# Altium PCB PCB4.PcbDoc
Units mm, origin at the board's own origin, x right, y up, seen from the top; angles counter-clockwise.
Board outline 46.5 x 66 mm, 2 copper layers (Top Layer, Bottom Layer); 30 components, 29 nets, 132 pads, 39 vias.
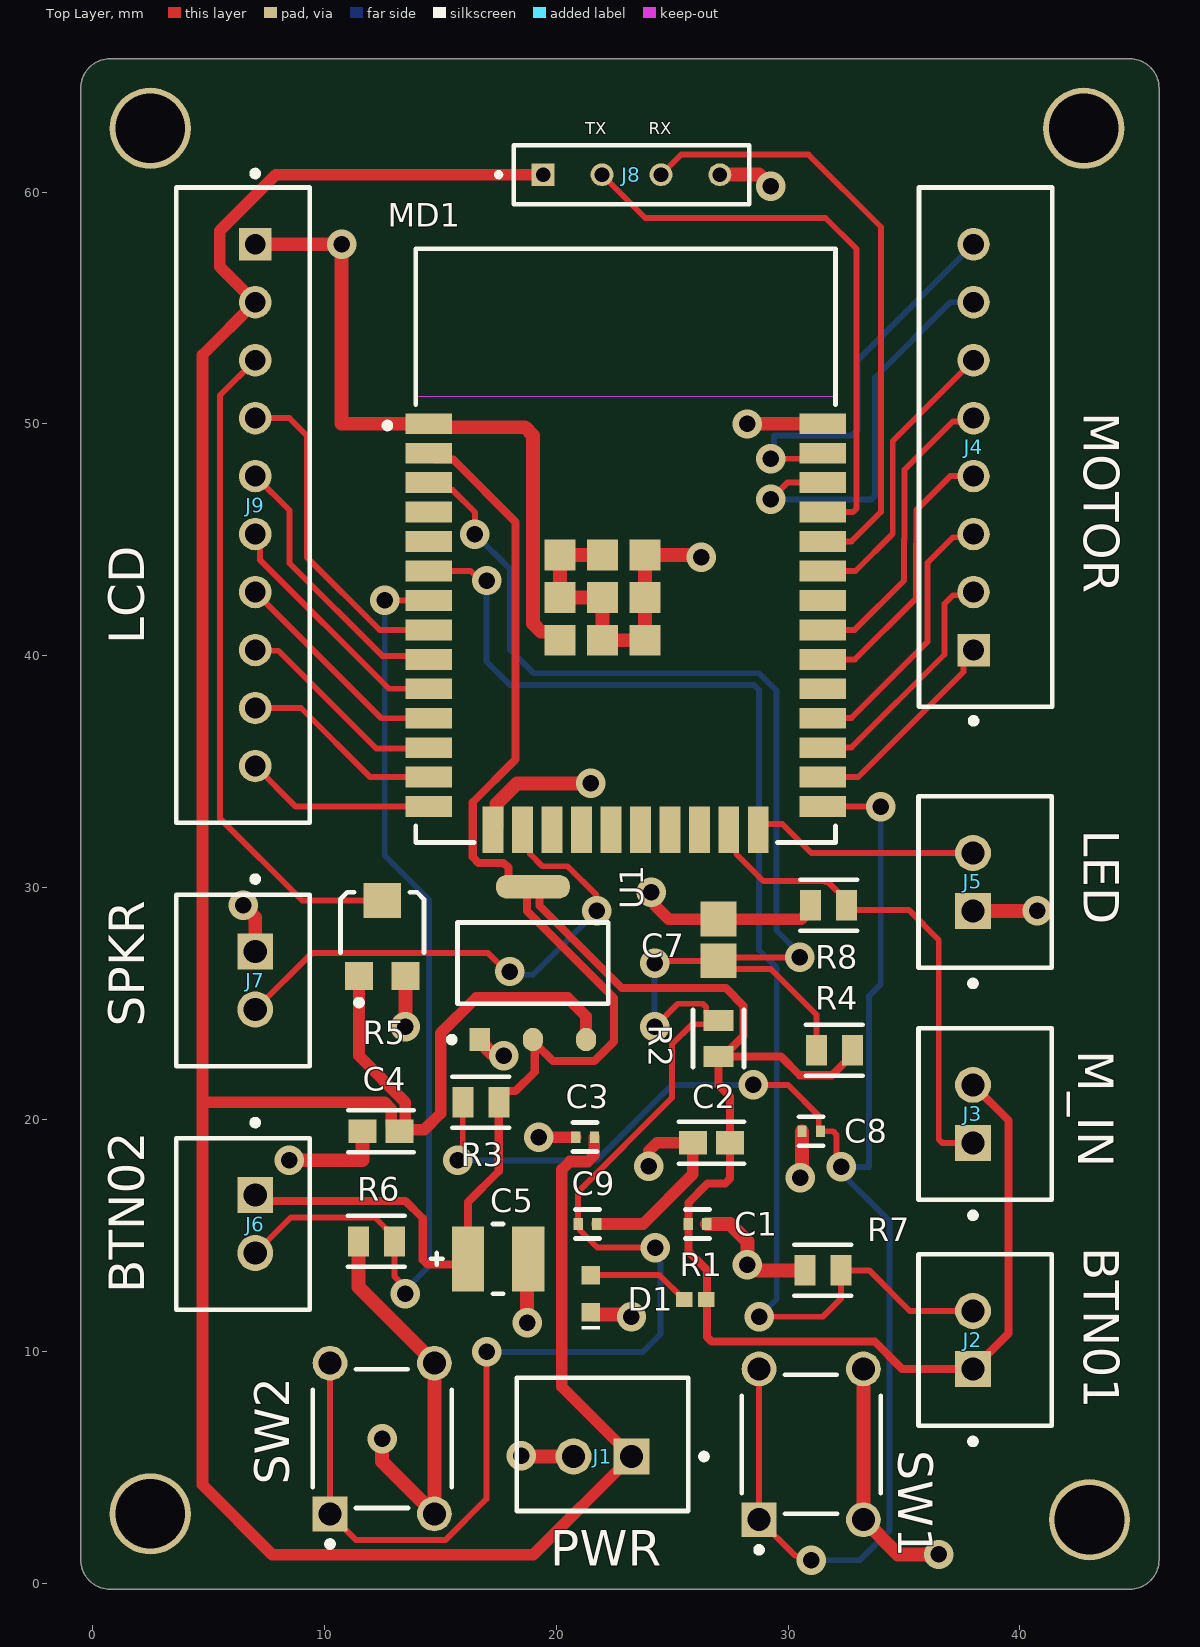
[diagram p0: Top Layer view]
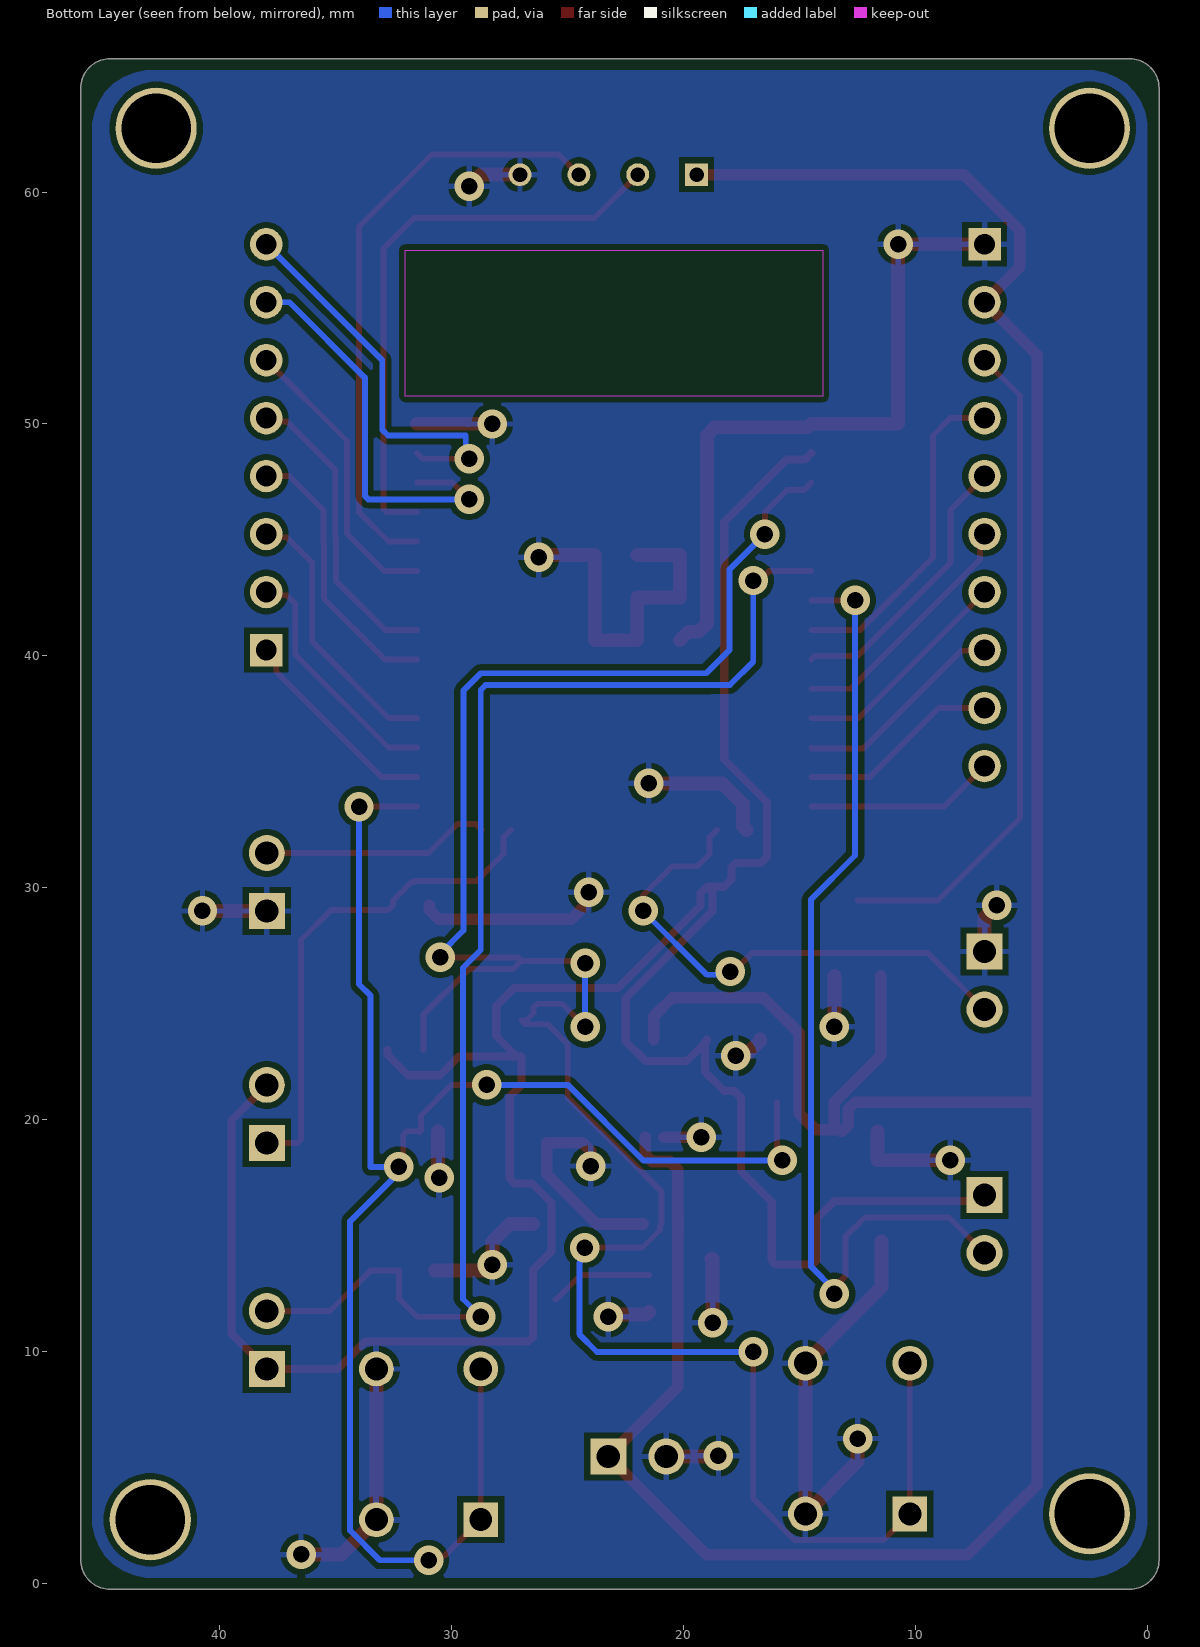
[diagram p1: Bottom Layer view, seen from below]
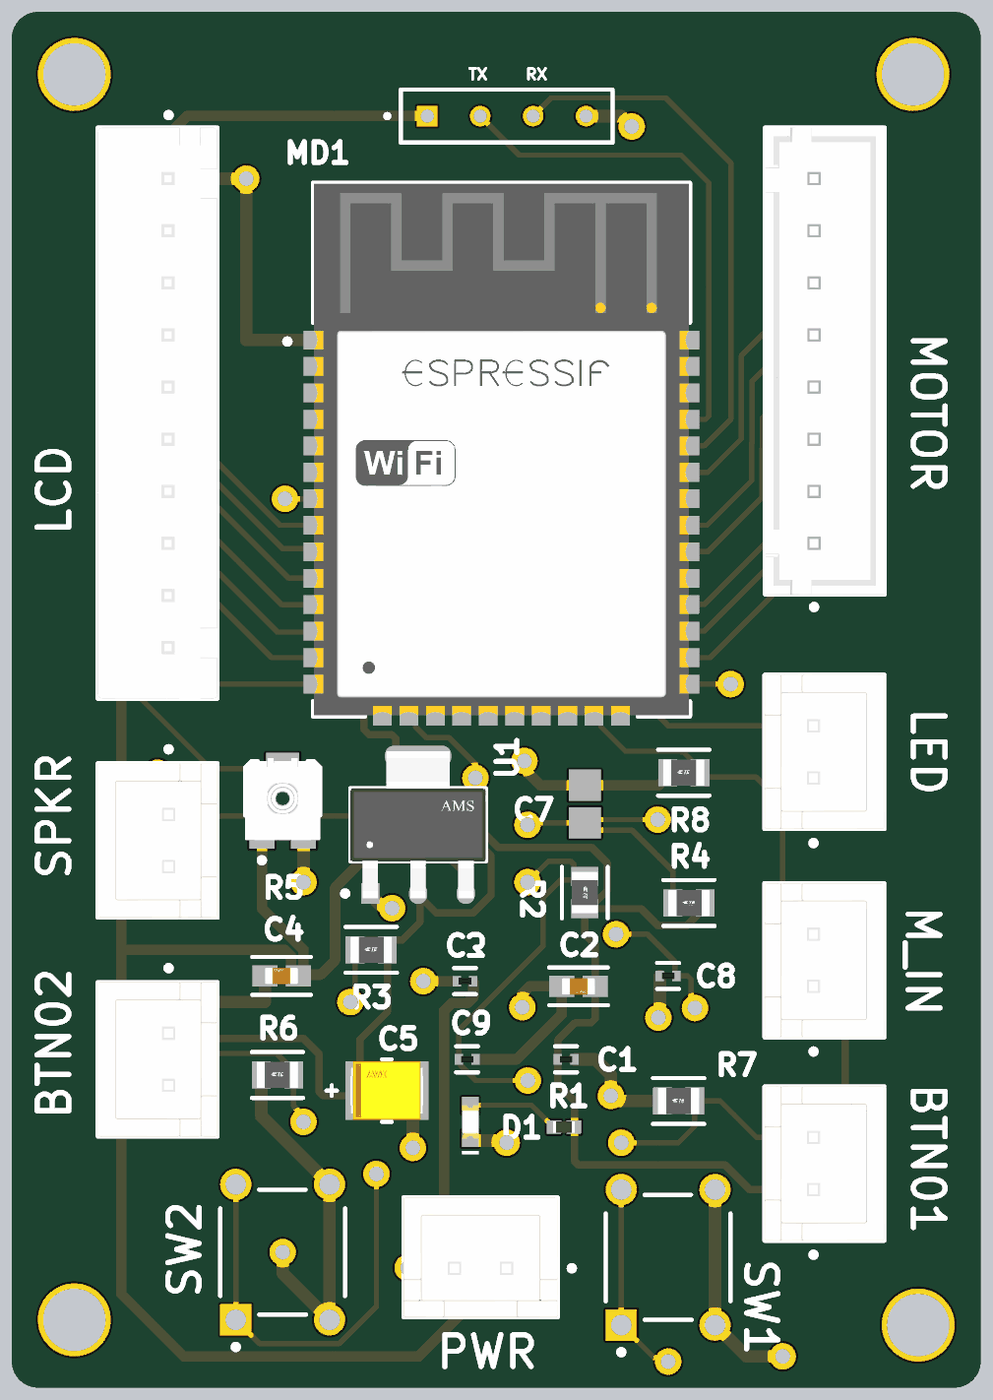
[diagram p2: 3D render of the assembled board from above, using the file's embedded part models]

## Layer stack, top to bottom
Top Solder: solder mask 0.0102, Solder Resist, Dk 3.5
Top Layer: signal copper 0.0356
Dielectric 1: dielectric 0.32, FR-4, Dk 4.8
Bottom Layer: signal copper 0.0356
Bottom Solder: solder mask 0.0102, Solder Resist, Dk 3.5

## Board outline
-0.5,1.02 ccw(c0.77,1.02) 0.77,-0.25 44.73,-0.25 ccw(c44.73,1.02) 46,1.02 46,64.48 ccw(c44.73,64.48) 44.73,65.75 0.77,65.75 ccw(c0.77,64.48) -0.5,64.48

## Design rules (kind name [scope] priority, off if disabled: settings)
Clearance Clearance_1 [OnMid vs OnMid] p1: gap=0.254 ignorepadtopadclearanceinfootprint=FALSE except(0: Arc-Hole Track-Hole SMDPad-Hole THPad-Hole Via-Hole Fill-Hole Poly-Hole Region-Hole Text-Hole Hole-Hole) sourcerule=36 cellrowname=All cellrowtype=0 cellcolname=All cellcoltype=0 innerlayers=TRUE
Clearance Clearance_2 [(ExistsOnLayer('Top Layer') Or ExistsOnLayer('Bottom Layer')) vs (ExistsOnLayer('Top Layer') Or ExistsOnLayer('Bottom Layer'))] p2: gap=0.254 ignorepadtopadclearanceinfootprint=FALSE except(0: Arc-Hole Track-Hole SMDPad-Hole THPad-Hole Via-Hole Fill-Hole Poly-Hole Region-Hole Text-Hole Hole-Hole) sourcerule=36 cellrowname=All cellrowtype=0 cellcolname=All cellcoltype=0 outerlayers=TRUE
Clearance [All] p3: gap=0.254 ignorepadtopadclearanceinfootprint=FALSE ismatrix=TRUE
HoleSize [All] p1: absolutevalues=TRUE maxlimit=3 minlimit=0.025 maxpercent=80.000 minpercent=20.000
MinimumSolderMaskSliver [All] p1: minsoldermaskwidth=0.09
PolygonConnect [All] p1: connectstyle=Relief reliefconductorwidth=0.254 reliefentries=4 polygonreliefangle="90 Angle" airgapwidth=0.254
RoutingTopology RoutingTopology_1 [All] p1: topology=Shortest
RoutingVias [All] p1: holewidth=0.711 width=1.27 viastyle="Through Hole" minholewidth=0.711 minwidth=1.27 maxholewidth=0.711 maxwidth=1.27
SolderMaskExpansion [All] p1: expansion=0.102 istentingtop=FALSE
UnRoutedNet [All] p1: checkbadconnections=TRUE
Width MaxMinWidth_1 [All] p1: maxlimit=0.6 minlimit=0.254 preferedwidth=0.3 bottomlayer_maxwidth=0.254 bottomlayer_prefwidth=0.254 minimp=50.000000 maximp=50.000000 favimp=50.000000
26 further rules are at their usual default settings.

## Components (designator, comment, footprint, x,y, rotation, side; value= is the part's Value field where it differs from the comment)
C1 "0.1uF" FP-GRM15-MFG 26.1,15.5 r0 top value=0.10μF
C2 "10uF" FP-GRM188-0_1-e0_2_0_55-IPC_A 26.698,19 r0 top
C3 "0.1uF" FP-GRM15-MFG 21.25,19.25 r0 top value=0.10μF
C4 "10uF" FP-GRM188-0_1-e0_2_0_55-IPC_A 12.448,19.5 r180 top
C5 "TAJB226K016RNJ" FP-TAJB-MFG 17.5,14 r180 top
C7 "1uF" CAPC2013X145X50ML20T25 27,27.75 r270 top
C8 "0.1uF" FP-GRM15-MFG 31,19.5 r0 top value=0.10μF
C9 "0.1uF" FP-GRM15-MFG 21.35,15.5 r180 top value=0.10μF
D1 "150060RS75000" WL-SMCW_0603_150060xx75000 21.5,12.5 r90 top
J1 "B2B-XH-A(LF)(SN)" FP-B2B-XH-A_LF_SN-MFG 22,6 r180 top
J2 "B2B-XH-A(LF)(SN)" FP-B2B-XH-A_LF_SN-MFG 38.5,10.5 r90 top
J3 "B2B-XH-A(LF)(SN)" FP-B2B-XH-A_LF_SN-MFG 38.5,20.25 r90 top
J4 "B8B-XH-A(LF)(SN)" FP-B8B-XH-A_LF_SN-MFG 38.525,49 r270 top
J5 "B2B-XH-A(LF)(SN)" FP-B2B-XH-A_LF_SN-MFG 38.5,30.25 r90 top
J6 "B2B-XH-A(LF)(SN)" FP-B2B-XH-A_LF_SN-MFG 6.5,15.5 r270 top
J7 "B2B-XH-A(LF)(SN)" FP-B2B-XH-A_LF_SN-MFG 6.5,26 r270 top
J8 "TS-104-T-A" SAMTEC_TS-104-T-A 23.25,60.75 r0 top
J9 "B10B-XH-A(LF)(SN)" FP-B10B-XH-A_LF_SN-MFG 6.5,46.5 r90 top
MD1 "ESP32-WROOM-32D" FP-ESP32-WROOM-32D-MFG 23,44.75 r0 top
R1 "RC0402JR-0775RL" RESC1005X40X25ML5T10 26,12.25 r180 top
R2 "10k" FP-CRG0805-IPC_C 27,23.5 r270 top
R3 "10k" FP-CRG0805-IPC_C 16.75,20.75 r0 top
R4 "10k" FP-CRG0805-IPC_C 32,23 r0 top
R5 "TC33X-2-103E" BOUR-TC33X-2_V 12.5,28 r90 top
R6 "10k" FP-CRG0805-IPC_C 12.25,14.75 r0 top
R7 "10k" FP-CRG0805-IPC_C 31.5,13.5 r0 top
R8 "10k" FP-CRG0805-IPC_C 31.75,29.25 r0 top
SW1 "1825910-6" TECO-1825910-6_V 31,6 r90 top
SW2 "1825910-6" TECO-1825910-6_V 12.5,6.25 r90 top
U1 "AMS1117-3.3" FP-AMS1117-IPC_C 19,26.75 r90 top

## Footprints (in the part's own frame and the unit in brackets; to place one, negate y for a bottom-side part, rotate by r counter-clockwise, add the part's x,y. Pads: shape width x height; smd on the part's side, far side on the other; paste and mask are expansions set on the pad)
BOUR-TC33X-2_V [mm] "SMD, 3-Leads, Body 3.8x3.6mm"
  rect 1.2x1.2 smd: 1(-1.8,1) 3(-1.8,-1)
  rect 1.5x1.6 smd: 2(1.45,0)
  silkscreen extent -3.07,-1.8 1.8,1.8, body extent -2,-1.8 1.96,1.8, height 1.15
CAPC2013X145X50ML20T25 [mm] "Chip Capacitor, 2-Leads, Body 2.00x1.25mm, IPC Low Density"
  rect 1.5x1.55 smd: 1(-0.9,0) 2(0.9,0)
  body extent -1.1,-0.72 1.1,0.72, height 1.45
FP-AMS1117-IPC_C [mm]
  rect 1.004x0.872 smd paste+0 mask+0: 1(-3.295,2.29)
  rrect100% 1.004x0.872 smd paste+0 mask+0: 2(-3.295,0) 3(-3.295,-2.29)
  rrect87% 1.004x3.182 smd paste+0 mask+0: 4(3.295,0)
  silkscreen extent -3.42,-3.25 1.75,3.62, body extent -3.9,-3.35 3.9,3.35, height 0.25
FP-B2B-XH-A_LF_SN-MFG [mm]
  rect 1.55x1.55 hole 1 paste-2539.97 mask+0: 1(-1.25,0.525)
  round 1.55 hole 1 paste-2539.97 mask+0: 2(1.25,0.525)
  silkscreen extent -4.5,-2.87 3.7,2.88, body extent -3.8,-2.98 3.8,2.98, height 0.25
FP-B8B-XH-A_LF_SN-MFG [mm]
  rect 1.4x1.4 hole 0.9 paste-2539.97 mask+0: 1(8.75,-0.525)
  round 1.4 hole 0.9 paste-2539.97 mask+0: 2(6.25,-0.525) 3(3.75,-0.525) 4(1.25,-0.525) 5(-1.25,-0.525) 6(-3.75,-0.525) 7(-6.25,-0.525) 8(-8.75,-0.525)
  silkscreen extent -11.2,-2.88 11.92,2.87, body extent -11.3,-2.98 11.3,2.98, height 0.25
FP-B10B-XH-A_LF_SN-MFG [mm]
  rect 1.4x1.4 hole 0.9 paste-2539.97 mask+0: 1(11.25,-0.525)
  round 1.4 hole 0.9 paste-2539.97 mask+0: 2(8.75,-0.525) 3(6.25,-0.525) 4(3.75,-0.525) 5(1.25,-0.525) 6(-1.25,-0.525) 7(-3.75,-0.525) 8(-6.25,-0.525) 9(-8.75,-0.525) 10(-11.25,-0.525)
  silkscreen extent -13.7,-2.88 14.42,2.87, body extent -13.8,-2.98 13.8,2.98, height 0.25
FP-CRG0805-IPC_C [mm]
  rect 0.906x1.307 smd paste+0 mask+0: 1(-0.776,0) 2(0.776,0)
  silkscreen extent -1.23,-1.1 1.23,1.1, body extent -1.33,-0.8 1.33,0.8, height 0.25
FP-ESP32-WROOM-32D-MFG [mm]
  rect 2x0.9 smd paste+0 mask+0: 1(-8.5,5.26) 2(-8.5,3.99) 3(-8.5,2.72) 4(-8.5,1.45) 5(-8.5,0.18) 6(-8.5,-1.09) 7(-8.5,-2.36) 8(-8.5,-3.63) 9(-8.5,-4.9) 10(-8.5,-6.17) 11(-8.5,-7.44) 12(-8.5,-8.71) 13(-8.5,-9.98) 14(-8.5,-11.25) 25(8.5,-11.25) 26(8.5,-9.98) 27(8.5,-8.71) 28(8.5,-7.44) 29(8.5,-6.17) 30(8.5,-4.9) 31(8.5,-3.63) 32(8.5,-2.36) 33(8.5,-1.09) 34(8.5,0.18) 35(8.5,1.45) 36(8.5,2.72) 37(8.5,3.99) 38(8.5,5.26)
  rect 0.9x2 smd paste+0 mask+0: 15(-5.715,-12.25) 16(-4.445,-12.25) 17(-3.175,-12.25) 18(-1.905,-12.25) 19(-0.635,-12.25) 20(0.635,-12.25) 21(1.905,-12.25) 22(3.175,-12.25) 23(4.445,-12.25) 24(5.715,-12.25)
  rect 1.33x1.33 smd paste+0 mask+0: 39(-2.835,-4.075) 39(-2.835,-2.24) 39(-2.835,-0.405) 39(-1,-4.075) 39(-1,-2.24) 39(-1,-0.405) 39(0.835,-4.075) 39(0.835,-2.24) 39(0.835,-0.405)
  Keep-Out Layer region: -9,6.45 9,6.45 9,12.75 -9,12.75
  Keep-Out Layer region: -9,6.45 9,6.45 9,12.75 -9,12.75
  silkscreen extent -10.4,-12.8 9.05,12.8, body extent -9.6,-13.35 9.6,12.9, height 0.25
FP-GRM15-MFG [mm]
  rect 0.4x0.5 smd paste+0 mask+0: 1(-0.4,0) 2(0.4,0)
  silkscreen extent -0.53,-0.62 0.52,0.63, body extent -0.3,-0.16 0.3,0.16, height 0.33
FP-GRM188-0_1-e0_2_0_55-IPC_A [mm]
  rect 1.208x1.012 smd paste+0 mask+0: 1(-0.802,0) 2(0.802,0)
  silkscreen extent -1.41,-0.91 1.41,0.91, body extent -1.91,-1.01 1.91,1.01, height 0.25
FP-TAJB-MFG [mm]
  rect 1.4x2.8 smd paste+0 mask+0: 1(-1.3,0) 2(1.3,0)
  silkscreen extent -0.23,-1.5 2.9,1.5, body extent -2.1,-1.6 2.1,1.6, height 0.25
RESC1005X40X25ML5T10 [mm] "Chip Resistor, 2-Leads, Body 1.05x0.55mm, IPC Low Density"
  rect 0.7x0.65 smd: 1(-0.475,0) 2(0.475,0)
  body extent -0.53,-0.28 0.53,0.28, height 0.4
SAMTEC_TS-104-T-A [mm]
  rect 0.985x0.985 hole 0.635: 01(-3.81,0)
  round 0.985 hole 0.635: 02(-1.27,0) 03(1.27,0) 04(3.81,0)
  silkscreen extent -5.83,-1.27 5.08,1.27
TECO-1825910-6_V [mm] "Switch, 4-Leads, Body 5.99x5.99mm"
  rect 1.5x1.5 hole 0.99: 1(-3.25,2.25)
  round 1.5 hole 0.99: 2(3.25,2.25) 3(-3.25,-2.25) 4(3.25,-2.25)
  silkscreen extent -4.67,-2.99 2.99,3, body extent -3,-2.99 2.99,3, height 5
WL-SMCW_0603_150060xx75000 [mm] "SMD Mono-color Chip LED, body 1.6x0.8mm"
  rect 0.8x0.8 smd: 1(-0.8,0) 2(0.8,0)
  silkscreen extent -1.55,-0.4 -1.4,0.4, body extent -0.8,-0.4 0.8,0.4, height 0.7

## Part data
C1 C3 C8 C9: library part CMP-2100-03641-2, "CAP CER 0.1UF 16V X7R 0402", Capacitance=0.10μF, Manufacturer=Murata, Manufacturer Part Number=GRM155R71C104KA88D, Package=GRM15, Temperature="-55°C to +125°C", Temperature Characteristic=X7R, Temperature Range High=+125°C, Temperature Range Low=-55°C, Tolerance=10%, Voltage Rating=16Vdc, Category=Cap, ComponentLink2Description=Datasheet, ComponentLink2URL=https://search.murata.co.jp/Ceramy/image/img/A01X/G101/ENG/GRM155R71H471KA01-01A.pdf, Device Class L1="Passive Components", Device Class L2=Capacitors, Device Class L3="Ceramic Capacitors", Digikey Description="CAP CER 0.1UF 16V X7R 0402", Height=0.55mm, Ipc Land Pattern Name=CAPC10050X219, Lead Free=yes, Material=Ceramic, Mouser Description="0402 0.1 uF 16V ±10 % Tolerance X7R SMT Multilayer Ceramic Capacitor", Octopart=https://octopart.com/grm155r71c104ka88d-murata-196880, RoHS=TRUE, Standoff Height=0mm
C2 C4: library part CMP-2006-02792-2, "Chip Multilayer Ceramic Capacitors for General Purpose, 0603, 10uF, X5R, 15%, 20%, 6.3V", Case Code (Imperial)=0603, Case Code (Metric)=1608, Dielectric=X5R, Max Operating Temperature=85°C, Min Operating Temperature=-55°C, Package Quantity=4000, Tolerance=20%, Voltage=6.3V, Capacitance=10uF, Case/Package=0603, Depth=0.8mm, Height=0.8mm, Lead Free="Lead Free", Length=1.6mm, Material=Ceramic, Mount="Surface Mount", Packaging="Tape and Reel", Radiation Hardening=No, REACH SVHC="No SVHC", Termination=SMD/SMT, Thickness=0.035inch, Voltage Rating=6.3V, Voltage Rating (DC)=6.3V, Width=0.031inch
C5: library part CMP-2100-03689-2, "22uF 16V  ±10% 2.3Ω 1210  SMD Tantalum Capacitor", Capacitance=22uF, Case Code (Imperial)=1210, Case Code (Metric)=3528, Dielectric Material=Tantalum, ESR (Equivalent Series Resistance)=2.3R, Leakage Current=3.5uA, Max Operating Temperature=125°C, Min Operating Temperature=-55°C, Package Quantity=1, Tolerance=10%, Voltage=16V, Case/Package=1210, Construction=Flat, Depth=2.8mm, Dissipation Factor=6%, Features="General Purpose", Height=1.9mm, Height - Seated (Max)=0.083inch, Lead Free="Lead Free", Length=3.5mm, Mount="Surface Mount", Number of Pins=2, Packaging="Tape and Reel", Polarity=Polar, Radiation Hardening=No, REACH SVHC="No SVHC", RoHS Compliant=Yes, Series=TAJ, Termination=SMD/SMT, Voltage Rating=16V, Voltage Rating (DC)=16V, Width=2.8mm
C7: library part CMP-1036-04731-2, Manufacturer=Kemet, Part Number=C0805C105K9PACTU
D1: library part CMP-1426-00001-3, Case Code (Imperial)=0603, Case Code (Metric)=1608, Color=Red, Forward Current=100mA, Forward Voltage=2V, Max Junction Temperature (Tj)=95°C, Max Operating Temperature=85°C, Max Reverse Voltage (DC)=5V, Min Operating Temperature=-40°C, Power Dissipation=72mW, Test Current=20mA, Case/Package=0603, Dominant Wavelength=625nm, Height=700µm, Length=1.6mm, Lens Style="Clear, Rectangular", Luminous Intensity=250mcd, Mount="Surface Mount", NexarPartId=29717776, Packaging="Tape and Reel", Peak Wavelength=630nm, REACH SVHC=Unknown, Reverse Voltage=5V, RoHS=Compliant, Viewing Angle=140°, Wavelength=625nm, Width=800µm
J1 J2 J3 J5 J6 J7: library part CMP-2000-05888-3, "CONN HEADER VERT 2POS 2.5MM", Color=Natural, Contact Resistance=20mR, Current Rating=3A, Housing Color=White, Insulation Resistance=1GR, Max Operating Temperature=85°C, Max Voltage Rating (AC)=250V, Min Operating Temperature=-25°C, Connector Type="Male Pin", Contact Material=Brass, Contact Plating=Tin, Contact Type="Male Pin", Depth=5.75mm, Fastening Type=Detent, Housing Material=Polyamide, Lead Free="Lead Free", Lead Pitch=2.5mm, Length=7.4mm, Max Current Rating=3A, Max Voltage Rating (DC)=250V, Mount="Through Hole", Number of Contacts=2, Number of Positions=2, Number of Rows=1, Orientation=Straight, Packaging=Bulk, Pitch=2.5mm, REACH SVHC="No SVHC", Series=XH, Termination=Solder, Voltage Rating=250V, Voltage Rating (AC)=250V, Wire/Cable Gauge=22AWG
J4: library part CMP-17438-000015-1, "CONN HEADER VERT 8POS 2.5MM", Color=Natural, Contact Resistance=20mR, Current Rating=3A, Housing Color=White, Insulation Resistance=1GR, Max Operating Temperature=85°C, Max Voltage Rating (AC)=250V, Min Operating Temperature=-25°C, Connector Type="Male Pin", Contact Material=Brass, Contact Plating=Tin, Contact Type="Male Pin", Depth=5.75mm, Fastening Type=Detent, Housing Material=Polyamide, Lead Free="Lead Free", Lead Pitch=2.5mm, Length=22.4mm, Max Current Rating=3A, Mount="Through Hole", Number of Contacts=8, Number of Positions=8, Number of Rows=1, Orientation=Straight, Packaging=Bulk, Pitch=2.5mm, REACH SVHC="No SVHC", Series=XH, Termination=Press-Fit, Voltage Rating=250V, Voltage Rating (AC)=250V, Wire/Cable Gauge=22AWG
J8: "TS - Samtec 2.54mm Single Row Machined Terminal Strip - Fast Stock", Package=None, Supplier Part Number 1=SAM1112-04-ND, Availability="In Stock", Check_prices=https://www.snapeda.com/parts/TS-104-T-A/Samtec+Inc./view-part/?ref=eda, MF="Samtec Inc.", MP=TS-104-T-A, Price=None, Purchase-URL=https://pricing.snapeda.com/search/part/TS-104-T-A/?ref=eda, SnapEDA_Link=https://www.snapeda.com/parts/TS-104-T-A/Samtec+Inc./view-part/?ref=snap, Supplier 1=Digikey
J9: library part CMP-17439-000145-1, "CONN HEADER VERT 10POS 2.5MM", Color=Natural, Contact Resistance=20mR, Current Rating=3A, Flammability Rating="UL94 V-0", Housing Color=White, Insulation Resistance=1GR, Max Operating Temperature=85°C, Max Voltage Rating (AC)=250V, Min Operating Temperature=-25°C, Connector Type=Header, Contact Finish - Mating=TIN, Contact Material=Brass, Contact Plating=Tin, Contact Shape=Square, Contact Type="Male Pin", Depth=5.75mm, Fastening Type=Detent, Gender=Male, Housing Material=Polyamide, Insulation Color=Natural, Insulation Material=Nylon, Lead Free="Lead Free", Lead Pitch=2.5mm, Length=27.4mm, Mated Stacking Heights=9.8mm, Max Current Rating=3A, Max Voltage Rating (DC)=250V, Mount="Through Hole", Number of Contacts=10, Number of Positions=10, Number of Rows=1, Orientation=Straight, Packaging=Bulk, Pitch=2.5mm, REACH SVHC="No SVHC", Series=XH, Termination=Solder, Voltage Rating=250V, Voltage Rating (AC)=250V, Wire/Cable Gauge=22AWG
MD1: library part CMP-194065-000003-1, "WIFI MODULE 32MBITS SPI FLASH", Manufacturer="Espressif Systems", Max Frequency=2484MHz, Max Supply Voltage=3.6V, Min Supply Voltage=3V, Nominal Supply Current=500mA, Temperature="-40°C to +85°C", Temperature Range High=+85°C, Temperature Range Low=-40°C, Automotive=No, Bandwidth=72MHz, Category=UNK, ComponentLink2Description=Datasheet, ComponentLink2URL=https://www.espressif.com/sites/default/files/documentation/esp32-wroom-32d_esp32-wroom-32u_datasheet_en.pdf, Data Rate=150Mbits/s, Device Class L1="Integrated Circuits (ICs)", Device Class L2="RF Semiconductors and Devices", Device Class L3=Transceivers, Digikey Description="WIFI MODULE 32MBITS SPI FLASH", Height=3.2mm, Interface=I2C,SPI,UART,Ethernet,I2S,Other, Lead Free=Yes, Manufacturer Part Number=ESP32-WROOM-32D, Mouser Description="Wi-Fi/BT BLE Module ESP32-D0WD, SPI Flash, UART, P", Number Of Adc Channels=16, Number Of Gpio=32, Octopart=https://octopart.com/esp32-wroom-32d-espressif+systems-91040050, Package=ESP32-WROOM-32D, RoHS=TRUE, Sensitivity=-98dBm
R1: library part CMP-2002-08044-2, "Chip Resistor, 75 Ohm, +/- 5%, 0.063 W, -55 to 155 degC, 0402 (1005 Metric), RoHS, Tape and Reel", Case Code (Imperial)=0402, Case Code (Metric)=1005, Max Operating Temperature="155 degC", Min Operating Temperature="-55 degC", Package Quantity=200, Power Rating="62.5 mW", Resistance="75 Ohm", Tolerance=5%, Voltage Rating="50 V", Case/Package=0402, ComponentLink1Description="Manufacturer URL", ComponentLink1URL=http://www.yageo.com/, ComponentLink2Description=Datasheet, ComponentLink2URL=http://www.yageo.com/documents/recent/PYu-RC_Group_51_RoHS_L_04.pdf, DatasheetVersion="Rev. 4, 02/2016", Height="0.35 mm", Length="1 mm", Mount="Surface Mount", Mounting Technology="Surface Mount", PackageDescription="2-Pin Surface Mount Device, Body 1 x 0.5 mm", Packaging="Tape and Reel", PartNumber=RC0402JR-0775RL, Radiation Hardening=No, REACH SVHC="No SVHC", RoHSCompliant=true, Width="0.5 mm"
R2 R3 R4 R6 R7 R8: library part CMP-03211-011401-1, "RES SMD 10K OHM 1% 1/8W 0805", Case/Package=0805, Max Operating Temperature=125°C, Min Operating Temperature=-55°C, Number of Resistors=1, Power Rating=125mW, Resistance=10kR, Resistor Type="Thick Film", Temperature Coefficient=100ppm/°C, Tolerance=1%, Voltage Rating=150V, Depth=1.25mm, ELV=Compliant, Height=0.55mm, Length=2mm, Mount="Surface Mount", Number of Terminations=2, Packaging="Tape and Reel", Radiation Hardening=No, RoHS Compliant=Yes, Series="CRG Series", Technology="THICK FILM", Termination=Solder
R5: library part CMP-2100-03695-1, "Trimming Potentiometer, 10000 Ohm, -40 to 100 degC, 3-Pin SMD, RoHS, Tape and Reel", Case/Package=SMD/SMT, Colour=Silver, Manufacturer=Bourns, Max Operating Temperature=100degC, Max Power Dissipation=100mW, Min Operating Temperature=-40degC, Package Description="3-Pin Surface Mount Device, Body 3.8 x 3.6 mm", Package Quantity=2500, Package Reference=TC33X-2, Resistance=10KOhm, Temperature Coefficient=250ppm/degreesC, Tolerance=25%, Voltage Rating (DC)=50V, Composition=Potentiometer, Contact Plating=Silver, Datasheet URL=http://www.bourns.com/docs/Product-Datasheets/TC33.pdf, Datasheet Version=42583.0, Depth=3.8mm, Height=0.047inch, Lead Free=LeadFree, Length=3mm, Manufacturer URL=http://www.bourns.com/, Military Standard=Not, Mount=SurfaceMount, Number of Turns=1, Packaging=TapeandReel, Power Rating=100mW, Radiation Hardening=No, REACH SVHC=NoSVHC, RoHSCompliant=true, Taper=Linear, Termination=FootPrint, Weight=29.4mg, Width=0.118inch
SW1 SW2: library part CMP-1684-00021-1, "Tact Switch, SPST-NO, 0.05 A, -35 to 85 degC, 4-Pin THD, RoHS, Bulk", Actuator Color=Black, Contact Rating @ Voltage=0.05A@24VDC, Dielectric Strength=500VAC, Manufacturer="TE Connectivity", Maximum AC Voltage Rating=N/A, Maximum Contact Resistance=100mOhm, Maximum DC Voltage Rating=24V, Minimum Insulation Resistance=100MOhm, Operating Temperature=-35to85C, Package Description="4-Pin Through Hole Device, Body 5.99 x 5.99 mm, Pitch 6.5 mm", Package Reference=THD, Actuator Length=1.4mm, Actuator Material=PolybutyleneTerephthalate, Actuator Style=RoundButton, Base Material=N/A, Body Orientation=Straight, Bushing Type=Unthreaded, Contact Material=CopperAlloy, Contact Plating=Silver, Datasheet URL=http://www.te.com/commerce/DocumentDelivery/DDEController?Action=showdoc&DocId=Customer+Drawing%7F1825910%7FC9%7Fpdf%7FEnglish%7FENG_CD_1825910_C9.pdf%7F1825910-6, Datasheet Version="Rev. C9", Dimension=5.99x5mm, Electrical Life=100000Cycles, Family=1825910, Function=MomentaryContact, Housing Material=N/A, Illumination=N/R, Manufacturer URL=http://www.te.com, Mechanical Life=100000Cycles, Mounting=ThroughHole, Packaging=N/A, Part No=1825910-6, Pole Throw Configuration=SPST, Product Weight=N/A, RoHS=Yes, Seal Description=N/A, Seal Location=N/A, Switch Configuration=OFF(ON), Terminal Type=PCPins, Thread Size=N/R
U1: library part CMP-209535-000001-1, "LDO Voltage Regulators 1A, 3.3V", Dropout Voltage=1.1V, Manufacturer="Advanced Monolithic Systems", Max Junction Temp=+125°C, Max Power Dissipation=1.2W, Max Supply Voltage=15V, Nominal Supply Current=5mA, Output Current=1A, Output Voltage=3.3V, Package=AMS1117, Temperature="-40°C to +125°C", Temperature Range Low=-40°C, Automotive=No, Category=IC, ComponentLink2Description=Datasheet, ComponentLink2URL=http://www.advanced-monolithic.com/pdf/ds1117.pdf, Device Class L1="Integrated Circuits (ICs)", Device Class L2="Power Management ICs", Device Class L3="Voltage Regulators - Linear", Height=1.8mm, Ipc Land Pattern Name=SOT229P700X180-4, Lead Free=Yes, Manufacturer Part Number=AMS1117-3.3, Number Of Outputs=1, Octopart=https://octopart.com/ams1117-3.3-advanced+monolithic+systems-25899300, Output Type=Fixed, RoHS=TRUE, Standoff Height=0.64mm, Temperature Range High=+125°C

## Free pads (board coordinates)
  round 3.5 hole 3: 2(2.5,62.75) 3(42.75,62.75) 4(43,2.75) 5(2.5,3)

## Via types
v1: diameter 1.27, hole 0.711, Top Layer to Bottom Layer, 39 vias

## Nets (pads, with @x,y where several pads share a name; then routed paths per layer and width w, separated by ;. In a path a pad name is that pad's centre, name@x,y a point inside that pad or via, vN(x,y) a via of type N, cw(c..) or ccw(c..) an arc to the next point about the centre after c; other vN are vias at no path point)
+5: C3.2 C4.1 J1.1 J8.01 J9.2 R5.1 U1.3 | length 138.7
  Top Layer w0.5: R5.1 11.5,22.75 13.5,20.75 13.5,19.75 C4.1 13.152,19.5 12.896,19.756 12.896,20.457 12.603,20.75 4.75,20.75 ; C4.1@13.5,19.561 14.311,19.561 15.017,20.267 15.017,23.719 16.548,25.25 20.5,25.25 21.29,24.46 U1.3 ; J8.01 7.912,60.75 5.5,58.338 5.5,56.775 J9.2 4.75,52.975 4.75,20.75 ; C3.2 21.65,18.489 21.357,18.196 20.596,18.196 20.25,17.85 20.25,15.963 20.246,15.959 20.246,15.041 20.25,15.037 20.25,8.475 J1.1 19.013,1.238 7.762,1.238 4.75,4.25 4.75,20.75
CHIP_PU: C7.2 C9.2 MD1.3 R2.1 R4.1 SW2.1 SW2.2 | length 100.8
  Top Layer w0.254: SW2.2 SW2.1 11.381,1.869 15.218,1.869 17,3.65 v1(17,10) ; MD1.3 14.823,47.147 15.542,47.147 16.5,46.189 v1(16.5,45.25) ; v1(24.25,24) 25.25,25 26.325,25 26.473,24.851 26.473,24.602 26.8,24.276 R2.1 26.838,24.114 25.864,24.114 25,23.25 25,20.947 20.95,16.897 C9.2 21.023,15.427 21.023,15.238 21.777,14.484 v1(24.266,14.484) ; v1(24.25,26.75) 24.35,26.85 C7.2 ; v1(30.5,27) 27.15,27 C7.2 ; R4.1 31.224,24.526 29.25,26.5 27.35,26.5 C7.2
  Bottom Layer w0.254: v1(16.5,45.25) 18.016,43.734 18.016,40.266 19.032,39.25 28.75,39.25 29.5,38.5 29.5,28.157 30.5,27.157 v1(30.5,27) ; v1(17,10) 17.016,9.984 23.734,9.984 24.5,10.75 24.5,13.827 24.46,13.867 24.46,14.29 v1(24.266,14.484) ; v1(24.25,24) v1(24.25,26.75)
GND: C1.2 C2.1 C3.1 C4.2 C5.1 C7.1 C8.1 C9.1 D1.1 J1.2 J5.1 J7.1 J8.04 J9.1 MD1.1 MD1.15 MD1.38 MD1.39 R5.3 R6.1 R7.1 R8.1 SW1.3 SW1.4 SW2.3 SW2.4 U1.1 | length 129.9
  Top Layer w0.5: v1(19.25,19.25) C3.1 ; C9.1 23.75,15.5 25.896,17.646 C2.1 24.351,19 24,18.649 v1(24,18) ; v1(24.1,29.814) 24.247,29.667 24.247,29.253 24.85,28.65 C7.1 30.574,28.65 30.974,29.05 R8.1
  Top Layer w0.6: v1(6.5,29.25) 7.025,28.725 J7.1 ; J9.1 v1(10.75,57.75) 10.75,50.01 MD1.1 14.65,49.86 15.551,49.86 18.649,49.86 19,49.509 19,41.391 19.351,41.04 19.8,41.04 MD1.39@20.165,40.675 ; v1(8.5,18.25) 11.646,18.25 C4.2 ; R6.1 11.474,12.776 SW2.4 SW2.3 12.5,5.25 v1(12.5,6.25) ; v1(13.5,24) R5.3 ; U1.1 16.71,23.389 17.221,22.878 17.622,22.878 v1(17.75,22.75) ; MD1.15 17.435,32.65 17.435,33.613 18.322,34.5 v1(21.5,34.5) ; v1(18.5,5.5) 18.525,5.475 J1.2 ; v1(18.75,11.25) 18.75,13.95 cw(c18.8,13.95) C5.1 ; D1.1 21.6,11.6 23.15,11.6 v1(23.25,11.5) ; MD1.39@22,44.345 20.165,44.345 20.165,42.51 22,42.51 22,40.675 23.835,40.675 23.835,42.51 23.835,44.345 26.155,44.345 v1(26.25,44.25) ; C1.2 27.5,15.5 28.25,14.75 v1(28.25,13.75) 28.431,13.75 28.681,13.5 R7.1 ; J8.04 28.75,60.75 v1(29.25,60.25) ; v1(28.25,50) 28.26,50.01 MD1.38 ; v1(30.532,17.5) 30.6,17.568 C8.1 ; SW1.4 SW1.3 34.75,1.25 v1(36.5,1.25) ; J5.1 v1(40.75,29)
GPIO: C8.2 MD1.25 R3.1 SW1.1 SW1.2 | length 72.4
  Top Layer w0.254: v1(15.75,18.25) 15.974,18.474 R3.1 ; v1(28.5,21.5) 30,21.5 31.327,20.173 31.327,19.523 C8.2@31.4,19.45 ; SW1.2 SW1.1 30.306,1.194 30.806,1.194 v1(31,1) ; C8.2 31.945,19.5 32.094,19.351 32.094,18.431 32.288,18.237 v1(32.288,17.962) ; MD1.25 v1(34,33.5)
  Bottom Layer w0.254: v1(15.75,18.25) 15.766,18.234 21.734,18.234 25,21.5 v1(28.5,21.5) ; v1(31,1) 33.099,1 34.381,2.282 34.381,15.619 32.288,17.712 v1(32.288,17.962) 33.5,17.962 33.5,25.343 34,25.844 v1(34,33.5)
IO2: J5.2 MD1.24 | length 9.9
  Top Layer w0.254: MD1.24 28.965,32.75 29.75,32.75 31,31.5 J5.2
IO4: J4.1 MD1.26 | length 9.1
  Top Layer w0.254: MD1.26 33.02,34.77 37.568,39.318 37.568,39.818 J4.1
IO12: J9.10 MD1.14 | length 8.2
  Top Layer w0.254: J9.10 8.775,33.5 MD1.14
IO13: J7.2 MD1.16 | length 22.7
  Top Layer w0.254: J7.2 9.456,27.181 17.069,27.181 17.861,26.389 v1(18,26.389) ; MD1.16 18.878,32.177 18.878,31.458 19.408,30.928 20.493,30.928 21.75,29.671 v1(21.75,29)
  Bottom Layer w0.254: v1(18,26.389) 18.139,26.25 19,26.25 v1(21.75,29)
IO14: J9.9 MD1.13 | length 8.7
  Top Layer w0.254: J9.9 8.5,37.75 9,37.75 11.98,34.77 MD1.13
IO15: J3.1 MD1.23 R8.2 | length 21.7
  Top Layer w0.254: MD1.23 27.768,32.177 27.768,31.458 28.942,30.285 31.585,30.285 31.627,30.242 31.735,30.242 32.526,29.451 R8.2 32.727,29.05 35.201,29.05 36.5,27.75 36.5,19.149 36.649,19 J3.1
IO16: J4.2 MD1.27 | length 10.6
  Top Layer w0.254: MD1.27 31.505,36.045 32.732,36.045 36.75,40.063 36.75,42.25 37.115,42.615 37.865,42.615 J4.2
IO17: J4.3 MD1.28 | length 11.8
  Top Layer w0.254: MD1.28 31.515,37.325 32.732,37.325 36.016,40.609 36.016,44.016 37.115,45.115 37.865,45.115 J4.3
IO18: J4.4 MD1.30 | length 12
  Top Layer w0.254: MD1.30 32.892,39.85 35.508,42.466 35.508,44.821 35.532,44.845 35.532,46.282 37,47.75 J4.4
IO19: J4.5 MD1.31 | length 13.1
  Top Layer w0.254: MD1.31 32.876,41.12 35,43.244 35,45.032 35.024,45.056 35.024,48.024 37.115,50.115 37.865,50.115 J4.5
IO21: J4.6 MD1.33 | length 12.6
  Top Layer w0.254: MD1.33 32.91,43.66 34.516,45.266 34.516,46.329 34.516,49.266 J4.6
IO22: J4.7 MD1.36 | length 17.8
  Top Layer w0.254: v1(29.25,46.75) 29.97,47.47 MD1.36
  Bottom Layer w0.254: v1(29.25,46.75) 33.601,46.75 33.75,46.899 33.75,52 37,55.25 J4.7
IO23: J4.8 MD1.37 | length 17.2
  Top Layer w0.254: v1(29.25,48.5) 31.26,48.5 MD1.37
  Bottom Layer w0.254: v1(29.25,48.5) 29.399,48.649 29.399,49.5 32.75,49.5 33,49.75 33,52.75 J4.8
IO25: J9.6 MD1.10 | length 10.8
  Top Layer w0.254: J9.6 7.226,45.049 7.226,44.146 12.792,38.58 MD1.10
IO26: J9.7 MD1.11 | length 9.7
  Top Layer w0.254: J9.7 12.465,37.31 MD1.11
IO27: J9.8 MD1.12 | length 9.3
  Top Layer w0.254: J9.8 7.054,40.221 8.029,40.221 12.25,36 14.46,36 MD1.12
IO32: J9.4 MD1.8 | length 14.3
  Top Layer w0.254: J9.4 8.5,50.25 9.25,49.5 9.25,44.25 12.38,41.12 MD1.8
IO33: J9.5 MD1.9 | length 12.1
  Top Layer w0.254: J9.5 8.5,46.275 8.5,44 12.5,40 14.35,40 MD1.9
IO34: J2.2 MD1.6 R7.2 | length 57.6
  Top Layer w0.254: MD1.6 16.315,43.66 16.725,43.25 v1(17,43.25) ; v1(28.75,11.5) 31.5,11.5 32.276,12.276 R7.2 33.5,13.5 35.25,11.75 J2.2
  Bottom Layer w0.254: v1(17,43.25) 17,39.75 18,38.75 18.814,38.75 18.822,38.742 28.54,38.742 28.75,38.532 28.75,27.313 29.516,26.547 29.516,12.266 v1(28.75,11.5)
IO35: J6.2 MD1.7 R6.2 | length 42.6
  Top Layer w0.254: J6.2 8.56,15.785 12.192,15.785 13.026,14.951 R6.2 13.026,13.249 13.5,12.775 v1(13.5,12.5) ; v1(12.61,42.39) MD1.7
  Bottom Layer w0.254: v1(12.61,42.39) 12.61,31.39 14.516,29.484 14.516,13.673 13.5,12.657 v1(13.5,12.5)
NetD1_2: D1.2 R1.2 | length 4.5
  Top Layer w0.254: D1.2 24.45,13.3 25.5,12.25 R1.2
NetJ9_3: J9.3 R5.2 | length 28.9
  Top Layer w0.254: J9.3 5.5,51.225 5.5,33 9.05,29.45 R5.2
RX: J8.03 MD1.34 | length 26.5
  Top Layer w0.254: J8.03 25.394,61.624 30.876,61.624 34.008,58.492 34.008,46.54 34.008,46.211 32.732,44.935 31.505,44.935 MD1.34
TX: J8.02 MD1.35 | length 25
  Top Layer w0.254: J8.02 23.846,58.884 31.616,58.884 32.95,57.55 32.95,46.349 32.801,46.2 MD1.35
VCC_3V3: C1.1 C2.2 C5.2 J2.1 J3.2 J6.1 MD1.2 R1.1 R2.2 R3.2 R4.2 U1.2 U1.4 | length 119
  Top Layer w0.35: J6.1 7.275,16.5 13.5,16.5 14.25,15.75 14.25,13.955 14.455,13.75 15.95,13.75 ccw(c15.95,14) C5.2 16.2,16.45 17.526,17.776 R3.2 17.526,20.951 17.804,21.229 18.248,21.229 19.08,22.061 U1.2@19.08,23.309 ; MD1.2 14.775,48.465 15.562,48.465 18.25,45.777 18.25,35.531 16.406,33.687 16.406,31.322 16.657,31.071 17.736,31.071 17.941,30.866 17.941,30.352 18.248,30.045 U1.4 ; U1.2@19,23.389 U1.2@19.08,23.309 ; U1.2 19.08,23.375 U1.2@19.08,23.309 ; R4.2 32.776,22.799 31.894,21.917 30.506,21.917 29.7,22.724 R2.2 ; J3.2 39.5,19.975 39.5,10.775 J2.1 34.917,9.25 33.738,10.429 26.705,10.429 26.5,10.634 26.5,13.513 25.7,14.313 C1.1 25.7,16.419 26.531,17.25 27.295,17.25 27.5,17.455 C2.2 27.5,21 27,21.5 R2.2 ; U1.4 19.277,29.768 19.277,29.223 22.829,25.671 27.318,25.671 28.083,24.907 28.083,23.606 27.201,22.724 R2.2 ; U1.4 18.75,29.795 18.75,29 22.5,25.25 22.5,23.376 21.648,22.524 19.865,22.524 U1.2@19.08,23.309
pads on no net: MD1.4 MD1.5 MD1.17 MD1.18 MD1.19 MD1.20 MD1.21 MD1.22 MD1.29 MD1.32

## Polygon pours and split planes (outlines as drawn)
GND on Bottom Layer "NONET_L01_P-001" (solid, pour order 0): 2.54,0.25 cw(c2.54,2.79) 0,2.79 0,62.71 cw(c2.54,62.71) 2.54,65.25 42.96,65.25 cw(c42.96,62.71) 45.5,62.71 45.5,2.79 cw(c42.96,2.79) 42.96,0.25 39,0.25

## Silkscreen, mask and mechanical layers (free items; w line width, h text height)
Top Overlay:
  text "TX" at 21.254,62.504 h0.52
  text "RX" at 24.004,62.504 h0.52
  text "MOTOR" at 42.754,50.496 h1.52 r270
  text "LCD" at 2.246,40.504 h1.52 r90
  text "LED" at 42.754,32.496 h1.52 r270
  text "SPKR" at 2.246,24.004 h1.52 r90
  text "M_IN" at 42.508,22.996 h1.52 r270
  text "BTN01" at 42.754,14.496 h1.52 r270
  text "BTN02" at 2.246,12.504 h1.52 r90
  text "PWR" at 19.754,0.754 h1.52
Mechanical 1:
  lines w0.254: -0.5,1.02 ccw(c0.77,1.02) 0.77,-0.25 23.5,-0.25 44.73,-0.25 ccw(c44.73,1.02) 46,1.02 46,64.48 ccw(c44.73,64.48) 44.73,65.75 0.77,65.75 ccw(c0.77,64.48) -0.5,64.48 -0.5,57.25 -0.5,1.02